# Altium PCB HW_Z-BAND_SMART_AMP_R1.PcbDoc (part 3 of 5)
Units mil, origin at the board's own origin, x right, y up, seen from the top; angles counter-clockwise.
Board outline 10200 x 3900 mil, 4 copper layers (Top Layer, Int1 (GND), Int2 (PWR), Bottom Layer), stack 60.134 mil thick; 398 components, 240 nets, 1098 pads, 2492 vias.
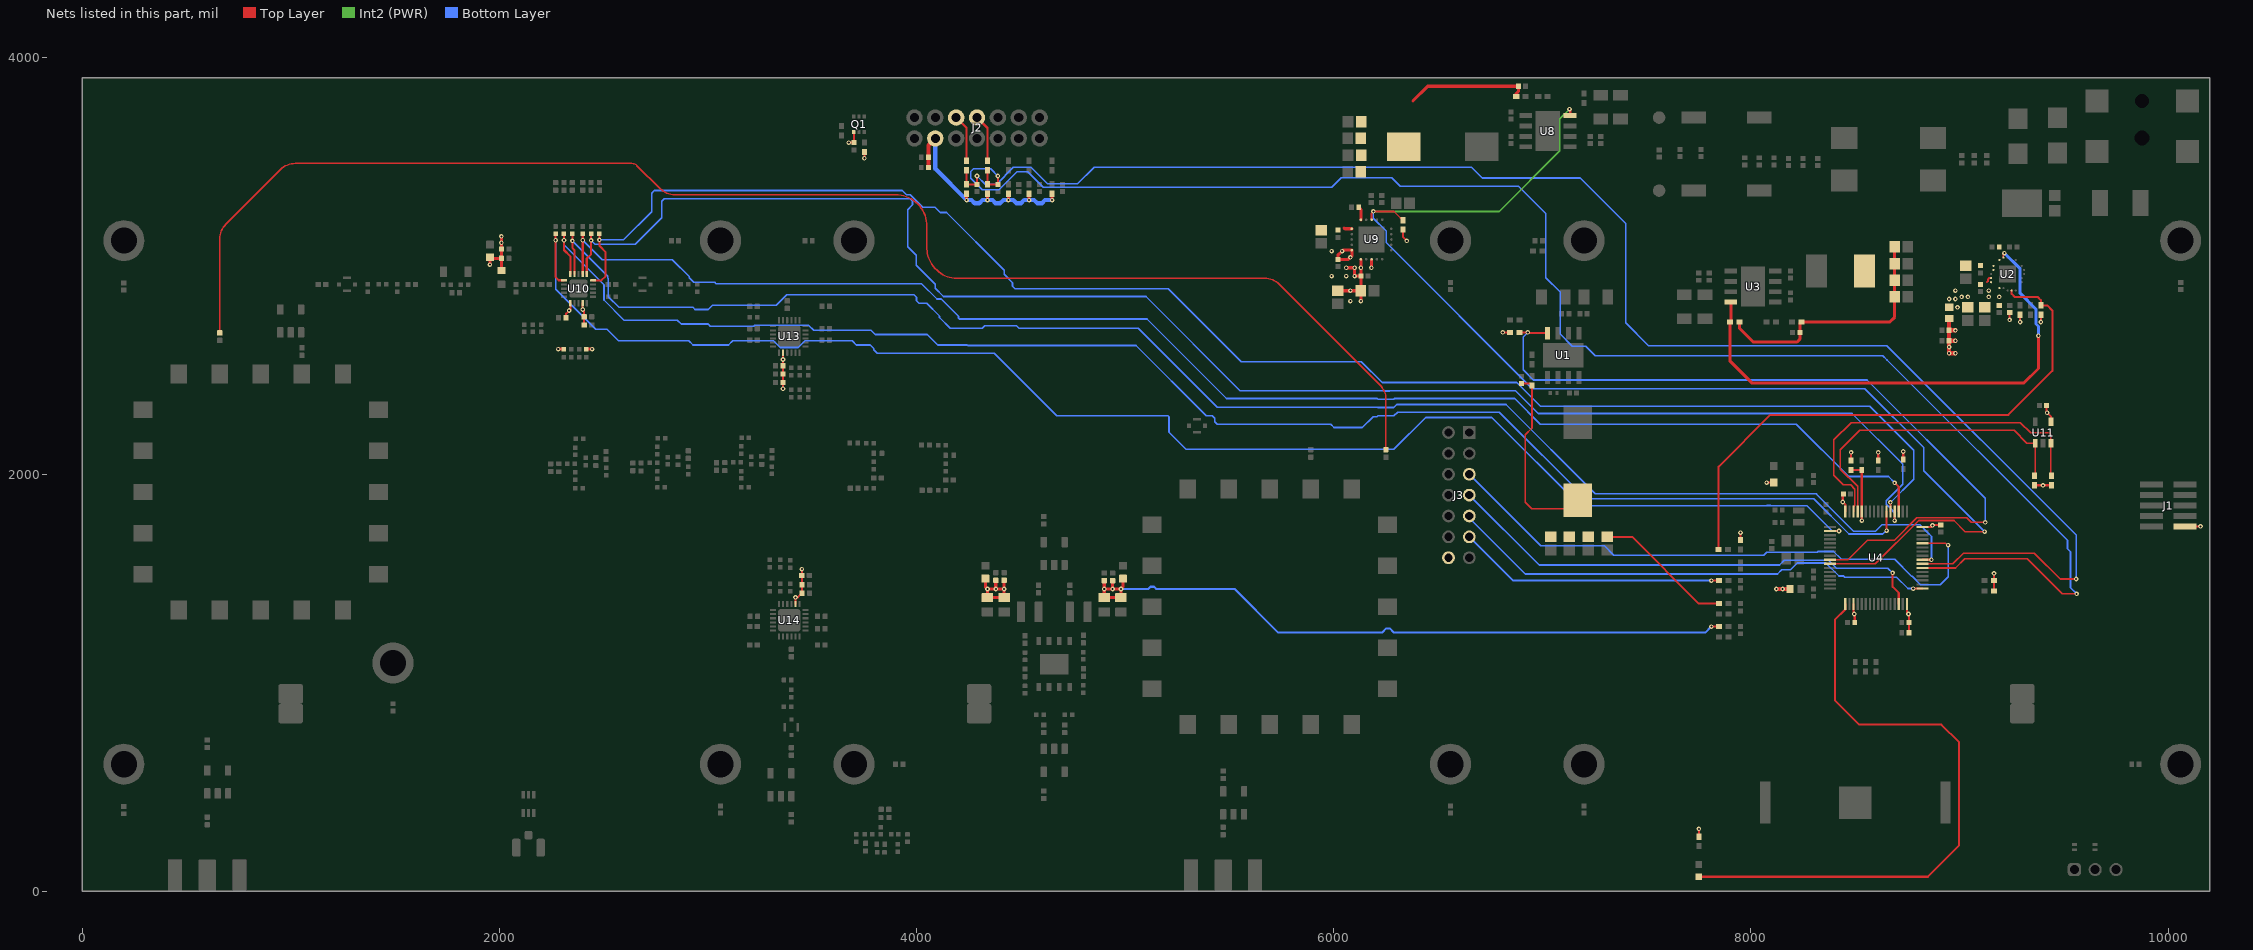
[diagram p4: the nets of this part, all layers, seen from the top]

## Part data (continued)
R3 R9 R10 R15 R16 R18 R19 R22 R23 R24 R25 R26 R27 R29 R31 R33 R39 R40 R41 R42 R43 R48 R129: library part RC0402FR-0710KL, "RES 10K OHM 1% 1/16W 0402", Device Package="0402 (1005 Metric)", Manufacturer=Yageo, Operating Temperature="-55°C ~ 155°C", Power (Watts)="0.063W, 1/16W", Supplier Device Package=0402, Supplier Part Number 1=311-10.0KLRCT-ND, Temperature Coefficient=±100ppm/°C, Tolerance=±1%, ComponentLink1Description=Datasheet, ComponentLink1URL=https://www.yageo.com/upload/media/product/productsearch/datasheet/rchip/PYu-RC_Group_51_RoHS_L_10.pdf, ComponentLink2Description="DigiKey Link", ComponentLink2URL=https://www.digikey.com/en/products/detail/yageo/RC0402FR-0710KL/726523, Composition="Thick Film", Features="Moisture Resistant", Height - Seated (Max)="0.016\" (0.40mm)", Lifecycle Status=Active, Minimum Order=1, Number of Terminations=2, Package / Case="0402 (1005 Metric)", Packaging=CutTape, Part Number=RC0402FR-0710KL, Part Status=Active, PartId=17593, Price=0.01, Resistance="10 kOhms", Series=RC_L, Size / Dimension="0.039\" L x 0.020\" W (1.00mm x 0.50mm)", Supplier 1=DigiKey
  R3 R9 R10 R15 R16 R18 R19 R23 R24 R25 R26 R27 R39 R40 R41 R42 R43 R48: LastUpdated="4/6/2026 7:41:07 PM"
  R22 R29 R31 R33 R129: LastUpdated="30.04.2023 19:24:29"
R4: library part RC0402FR-0724K9L, "RES 24.9K OHM 1% 1/16W 0402", Device Package="0402 (1005 Metric)", Manufacturer=Yageo, Operating Temperature="-55°C ~ 155°C", Power (Watts)="0.063W, 1/16W", Supplier Device Package=0402, Supplier Part Number 1=311-24.9KLRCT-ND, Temperature Coefficient=±100ppm/°C, Tolerance=±1%, ComponentLink1Description=Datasheet, ComponentLink1URL=https://www.yageo.com/upload/media/product/productsearch/datasheet/rchip/PYu-RC_Group_51_RoHS_L_10.pdf, ComponentLink2Description="DigiKey Link", ComponentLink2URL=https://www.digikey.com/en/products/detail/yageo/RC0402FR-0724K9L/726567, Composition="Thick Film", Features="Moisture Resistant", Height - Seated (Max)="0.016\" (0.40mm)", LastUpdated="4/6/2026 7:41:07 PM", Lifecycle Status=Active, Minimum Order=1, Number of Terminations=2, Package / Case="0402 (1005 Metric)", Packaging=CutTape, Part Number=RC0402FR-0724K9L, Part Status=Active, PartId=17908, Price=0.01, Resistance="24.9 kOhms", Series=RC_L, Size / Dimension="0.039\" L x 0.020\" W (1.00mm x 0.50mm)", Supplier 1=DigiKey
R5: "RES 100R 1/10W 0402 1%", Manufacturer 1="PANASONIC ELECTRONIC COMPONENTS", Manufacturer Part Number 1=ERJ-2RKF1000X, Package=0402, PackageType=SMD, Tolerance=±1%, Check=Approved, ComponentLink1Description=Digi-Key, ComponentLink1URL=https://www.digikey.com/en/products/detail/panasonic-electronic-components/ERJ-2RKF1000X/192080?utm_adgroup=&utm_source=google&utm_medium=cpc&utm_campaign=Pmax_Product_All%20Products&utm_term=&utm_content=&utm_id=go_cmp-18790247214_adg-_ad-__dev-c_ext-_prd-_sig-EAIaIQobChMIqPWSmvPUggMVK5JoCR2T3g0zEAAYASAAEgI7GvD_BwE&gad_source=1&gclid=EAIaIQobChMIqPWSmvPUggMVK5JoCR2T3g0zEAAYASAAEgI7GvD_BwE, ComponentLink2Description=Datasheet, Location=NA, MaxHeight_mm=0.4, MSL Level=Level-1, Status=Active, UnitPrice=0.1
R6: "RES 820R 1/10W 0402 1%", M_Frequency(MHz)=NA, M_RatedPower(W)=0.1, Manufacturer 1="KOA SPEER ELECTRONICS, INC.", Manufacturer Part Number 1=RK73H1ETTP8200F, Package=0402, PackageType=SMD, Supplier Part Number 1=2019-RK73H1ETTP8200FTR-ND, Tolerance=±1%, Check=Approved, Location=NA, M_AmpersPerContact=NA, M_Duty Cycle(%)=NA, M_ESR(mΩ)=NA, M_MatingCycle=NA, M_Number_of_Bits(K)=NA, M_Number_of_Pins=2, M_Number_of_Transistors_Gates_or_Bits=NA, M_OperatingVoltage(V)=NA, M_ProgrammingCycles=NA, M_RatedVoltage(V)=NA, M_ThermalResistance(θJABC)(°C/W)=NA, MaxHeight_mm=0.4, MSL Level=Level-1, Status=Active, Supplier 1=Digikey, UnitPrice=0.1
R7 R35 R37 R130: library part AC0402FR-07100KL, "RES SMD 100K OHM 1% 1/16W 0402", Device Package="0402 (1005 Metric)", Manufacturer=Yageo, Operating Temperature="-55°C ~ 155°C", Power (Watts)="0.063W, 1/16W", Ratings=AEC-Q200, Supplier Device Package=0402, Supplier Part Number 1=YAG3434CT-ND, Temperature Coefficient=±100ppm/°C, Tolerance=±1%, ComponentLink1Description=Datasheet, ComponentLink1URL=https://www.yageo.com/upload/media/product/productsearch/datasheet/rchip/PYu-AC_51_RoHS_L_7.pdf, ComponentLink2Description="DigiKey Link", ComponentLink2URL=https://www.digikey.com/en/products/detail/yageo/AC0402FR-07100KL/5895021, Composition="Thick Film", Features="Automotive AEC-Q200, Moisture Resistant", Height - Seated (Max)="0.015\" (0.37mm)", LastUpdated="4/6/2026 7:41:12 PM", Lifecycle Status=Active, Minimum Order=1, Number of Terminations=2, Package / Case="0402 (1005 Metric)", Packaging=CutTape, Part Number=AC0402FR-07100KL, Part Status=Active, PartId=12047, Price=0.01, Resistance="100 kOhms", Series=AC, Size / Dimension="0.039\" L x 0.020\" W (1.00mm x 0.50mm)", Supplier 1=DigiKey
R17: library part ERA-2AEB3572X, "RES SMD 35.7KOHM 0.1% 1/16W 0402", Device Package="0402 (1005 Metric)", Manufacturer="Panasonic Electronic Components", Operating Temperature="-55°C ~ 155°C", Power (Watts)="0.063W, 1/16W", Ratings=AEC-Q200, Supplier Device Package=0402, Supplier Part Number 1=P35.7KDCCT-ND, Temperature Coefficient=±25ppm/°C, Tolerance=±0.1%, ComponentLink1Description=Datasheet, ComponentLink1URL=https://industrial.panasonic.com/cdbs/www-data/pdf/RDM0000/AOA0000C307.pdf, ComponentLink2Description="DigiKey Link", ComponentLink2URL=https://www.digikey.com/en/products/detail/panasonic-electronic-components/ERA-2AEB3572X/2026192, Composition="Thin Film", Features="Automotive AEC-Q200", Height - Seated (Max)="0.016\" (0.40mm)", LastUpdated="2/9/2024 8:29:52 PM", Lifecycle Status=Active, Minimum Order=1, Number of Terminations=2, Package / Case="0402 (1005 Metric)", Packaging=TapeAndReel, Part Number=ERA-2AEB3572X, Part Status=Active, PartId=11364, Price=0.04, Resistance="35.7 kOhms", Series=ERA-2A, Size / Dimension="0.039\" L x 0.020\" W (1.00mm x 0.50mm)", Supplier 1=DigiKey
R20 R21 R30 R45 R46 R47: library part RT0402FRE07100RL, "RES SMD 100 OHM 1% 1/16W 0402", Device Package="0402 (1005 Metric)", Manufacturer=Yageo, Operating Temperature="-55°C ~ 155°C", Power (Watts)="0.063W, 1/16W", Supplier Device Package=0402, Supplier Part Number 1=YAG3342CT-ND, Temperature Coefficient=±50ppm/°C, Tolerance=±1%, ComponentLink1Description=Datasheet, ComponentLink1URL=https://www.yageo.com/upload/media/product/productsearch/datasheet/rchip/PYu-RT_1-to-0.01_RoHS_L_11.pdf, ComponentLink2Description="DigiKey Link", ComponentLink2URL=https://www.digikey.com/en/products/detail/yageo/RT0402FRE07100RL/1071699, Composition="Thin Film", Height - Seated (Max)="0.014\" (0.35mm)", LastUpdated="4/6/2026 7:41:17 PM", Lifecycle Status=Active, Minimum Order=1, Number of Terminations=2, Package / Case="0402 (1005 Metric)", Packaging=TapeAndReel, Part Number=RT0402FRE07100RL, Part Status=Active, PartId=3193, Price=0.01, Resistance="100 Ohms", Series=RT, Size / Dimension="0.039\" L x 0.020\" W (1.00mm x 0.50mm)", Supplier 1=DigiKey
R28: library part RT0402FRE0712K4L, "RES SMD 12.4K OHM 1% 1/16W 0402", Device Package="0402 (1005 Metric)", Manufacturer=Yageo, Operating Temperature="-55°C ~ 155°C", Power (Watts)="0.063W, 1/16W", Supplier Device Package=0402, Supplier Part Number 1=13-RT0402FRE0712K4LCT-ND, Temperature Coefficient=±50ppm/°C, Tolerance=±1%, ComponentLink1Description=Datasheet, ComponentLink1URL=https://www.yageo.com/upload/media/product/productsearch/datasheet/rchip/PYu-RT_1-to-0.01_RoHS_L_12.pdf, ComponentLink2Description="DigiKey Link", ComponentLink2URL=https://www.digikey.com/en/products/detail/yageo/RT0402FRE0712K4L/1071739, Composition="Thin Film", Height - Seated (Max)="0.014\" (0.35mm)", LastUpdated="4/6/2026 7:40:57 PM", Lifecycle Status=Active, Minimum Order=1, Number of Terminations=2, Package / Case="0402 (1005 Metric)", Packaging=TapeAndReel, Part Number=RT0402FRE0712K4L, Part Status=Active, PartId=64983, Price=0.01, Resistance="12.4 kOhms", Series=RT, Size / Dimension="0.039\" L x 0.020\" W (1.00mm x 0.50mm)", Supplier 1=DigiKey
R32 R44: library part RMCF0402FT2K20, "RES 2.2K OHM 1% 1/16W 0402", Device Package="0402 (1005 Metric)", Manufacturer="Stackpole Electronics Inc", Operating Temperature="-55°C ~ 155°C", Power (Watts)="0.063W, 1/16W", Ratings=AEC-Q200, Supplier Device Package=0402, Supplier Part Number 1=RMCF0402FT2K20CT-ND, Temperature Coefficient=±100ppm/°C, Tolerance=±1%, ComponentLink1Description=Datasheet, ComponentLink1URL=https://www.seielect.com/catalog/sei-rmcf_rmcp.pdf, ComponentLink2Description="DigiKey Link", ComponentLink2URL=https://www.digikey.com/en/products/detail/stackpole-electronics-inc/RMCF0402FT2K20/2417439, Composition="Thick Film", Features="Automotive AEC-Q200", Height - Seated (Max)="0.016\" (0.40mm)", LastUpdated="2/9/2024 8:30:13 PM", Lifecycle Status=Active, Minimum Order=1, Number of Terminations=2, Package / Case="0402 (1005 Metric)", Packaging=CutTape, Part Number=RMCF0402FT2K20, Part Status=Active, PartId=4919, Price=0.01, Resistance="2.2 kOhms", Series=RMCF, Size / Dimension="0.039\" L x 0.020\" W (1.00mm x 0.50mm)", Supplier 1=DigiKey
R34: library part AC0402FR-0712K4L, "RES SMD 12.4K OHM 1% 1/16W 0402", Device Package="0402 (1005 Metric)", Manufacturer=Yageo, Operating Temperature="-55°C ~ 155°C", Power (Watts)="0.063W, 1/16W", Ratings=AEC-Q200, Supplier Device Package=0402, Supplier Part Number 1=YAG5256CT-ND, Temperature Coefficient=±100ppm/°C, Tolerance=±1%, ComponentLink1Description=Datasheet, ComponentLink1URL=https://www.yageo.com/upload/media/product/productsearch/datasheet/rchip/PYu-AC_51_RoHS_L_7.pdf, ComponentLink2Description="DigiKey Link", ComponentLink2URL=https://www.digikey.com/en/products/detail/yageo/AC0402FR-0712K4L/5895055, Composition="Thick Film", Features="Automotive AEC-Q200, Moisture Resistant", Height - Seated (Max)="0.015\" (0.37mm)", LastUpdated="4/6/2026 7:41:12 PM", Lifecycle Status=Active, Minimum Order=1, Number of Terminations=2, Package / Case="0402 (1005 Metric)", Packaging=CutTape, Part Number=AC0402FR-0712K4L, Part Status=Active, PartId=11140, Price=0.01, Resistance="12.4 kOhms", Series=AC, Size / Dimension="0.039\" L x 0.020\" W (1.00mm x 0.50mm)", Supplier 1=DigiKey
R36: library part ERA-2AEB4121X, "RES SMD 4.12KOHM 0.1% 1/16W 0402", Device Package="0402 (1005 Metric)", Manufacturer="Panasonic Electronic Components", Operating Temperature="-55°C ~ 155°C", Power (Watts)="0.063W, 1/16W", Ratings=AEC-Q200, Supplier Device Package=0402, Supplier Part Number 1=P4.12KDCCT-ND, Temperature Coefficient=±25ppm/°C, Tolerance=±0.1%, ComponentLink1Description=Datasheet, ComponentLink1URL=https://industrial.panasonic.com/cdbs/www-data/pdf/RDM0000/AOA0000C307.pdf, ComponentLink2Description="DigiKey Link", ComponentLink2URL=https://www.digikey.com/en/products/detail/panasonic-electronic-components/ERA-2AEB4121X/2026108, Composition="Thin Film", Features="Automotive AEC-Q200", Height - Seated (Max)="0.016\" (0.40mm)", LastUpdated="2/9/2024 8:30:08 PM", Lifecycle Status=Active, Minimum Order=1, Number of Terminations=2, Package / Case="0402 (1005 Metric)", Packaging=TapeAndReel, Part Number=ERA-2AEB4121X, Part Status=Active, PartId=6142, Price=0.04, Resistance="4.12 kOhms", Series=ERA-2A, Size / Dimension="0.039\" L x 0.020\" W (1.00mm x 0.50mm)", Supplier 1=DigiKey
R49 R80 R81: "RES 5R6 1/10W 0402 1%", M_Frequency(MHz)=NA, M_RatedPower(W)=0.1, Manufacturer 1="KOA SPEER ELECTRONICS, INC.", Manufacturer Part Number 1=RK73H1ETTP5R60F, Package=0402, PackageType=SMD, Supplier Part Number 1=2019-RK73H1ETTP5R60FTR-ND, Tolerance=±1%, Check=Approved, Location=NA, M_AmpersPerContact=NA, M_Duty Cycle(%)=NA, M_ESR(mΩ)=NA, M_MatingCycle=NA, M_Number_of_Bits(K)=NA, M_Number_of_Pins=2, M_Number_of_Transistors_Gates_or_Bits=NA, M_OperatingVoltage(V)=NA, M_ProgrammingCycles=NA, M_RatedVoltage(V)=NA, M_ThermalResistance(θJABC)(°C/W)=NA, MaxHeight_mm=0.4, MSL Level=Level-1, Status=Active, Supplier 1=Digikey, UnitPrice=0.1
R50 R51 R82 R83 R84 R85: "RES 866R 1/10W 0402 1%", M_Frequency(MHz)=NA, M_RatedPower(W)=0.1, Manufacturer 1="KOA SPEER ELECTRONICS, INC.", Manufacturer Part Number 1=RK73H1ETTP8660F, Package=0402, PackageType=SMD, Supplier Part Number 1=2019-RK73H1ETTP8660FTR-ND, Tolerance=±1%, Check=Approved, Location=NA, M_AmpersPerContact=NA, M_Duty Cycle(%)=NA, M_ESR(mΩ)=NA, M_MatingCycle=NA, M_Number_of_Bits(K)=NA, M_Number_of_Pins=2, M_Number_of_Transistors_Gates_or_Bits=NA, M_OperatingVoltage(V)=NA, M_ProgrammingCycles=NA, M_RatedVoltage(V)=NA, M_ThermalResistance(θJABC)(°C/W)=NA, MaxHeight_mm=0.4, MSL Level=Level-1, Status=Active, Supplier 1=Digikey, UnitPrice=0.1
R52 R53 R54 R58 R59 R72 R74 R75 R76 R77 R78 R79 R125 R126 R127 R128: "RES 0R 1/10W 0402", M_Frequency(MHz)=NA, M_RatedPower(W)=0.1, Manufacturer 1="PANASONIC ELECTRONIC COMPONENTS", Manufacturer Part Number 1=ERJ-2GE0R00X, Package=0402, PackageType=SMD, Supplier Part Number 1=P0.0JTR-ND, Check=Approved, ComponentLink1Description=Digi-Key, ComponentLink1URL=https://www.digikey.com/en/products/detail/panasonic-electronic-components/ERJ-2GE0R00X/146727?utm_adgroup=&utm_source=google&utm_medium=cpc&utm_campaign=Pmax_Product_All%20Products&utm_term=&utm_content=&utm_id=go_cmp-18790247214_adg-_ad-__dev-c_ext-_prd-_sig-EAIaIQobChMI6dXOvs-qgwMVM4loCR0TKwG5EAAYASAAEgIbCfD_BwE&gad_source=1&gclid=EAIaIQobChMI6dXOvs-qgwMVM4loCR0TKwG5EAAYASAAEgIbCfD_BwE, ComponentLink2Description=Datasheet, ComponentLink2URL="D:\SAVRONIK_SVN\Donanım\trunk\ALTIUM\Central Library\Datasheets\Resistor\ERJ-2GE0R00X_Datasheet.pdf", Location=NA, M_AmpersPerContact=NA, M_Duty Cycle(%)=NA, M_ESR(mΩ)=NA, M_MatingCycle=NA, M_Number_of_Bits(K)=NA, M_Number_of_Pins=2, M_Number_of_Transistors_Gates_or_Bits=NA, M_OperatingVoltage(V)=NA, M_ProgrammingCycles=NA, M_RatedVoltage(V)=NA, M_ThermalResistance(θJABC)(°C/W)=NA, MaxHeight_mm=0.4, MSL Level=Level-1, SAP=1014381, Status=Active, Supplier 1=Digikey, UnitPrice=0.1
R55 R67 R68 R73 R96 R97 R99 R100 R101 R103 R106 R110 R111 R112 R115 R121 R122 R131 R132 R133: "RES 0R 1/10W 0402", Manufacturer 1="PANASONIC ELECTRONIC COMPONENTS", Manufacturer Part Number 1=ERJ-2GE0R00X, Package=0402, PackageType=SMD, Supplier Part Number 1=P0.0JTR-ND, Check=Approved, ComponentLink1Description=Digi-Key, ComponentLink1URL=https://www.digikey.com/en/products/detail/panasonic-electronic-components/ERJ-2GE0R00X/146727?utm_adgroup=&utm_source=google&utm_medium=cpc&utm_campaign=Pmax_Product_All%20Products&utm_term=&utm_content=&utm_id=go_cmp-18790247214_adg-_ad-__dev-c_ext-_prd-_sig-EAIaIQobChMI6dXOvs-qgwMVM4loCR0TKwG5EAAYASAAEgIbCfD_BwE&gad_source=1&gclid=EAIaIQobChMI6dXOvs-qgwMVM4loCR0TKwG5EAAYASAAEgIbCfD_BwE, ComponentLink2Description=Datasheet, Location=NA, MaxHeight_mm=0.4, MSL Level=Level-1, Status=Active, Supplier 1=Digikey, UnitPrice=0.1
  R55 R97 R103: Assembly=DNP
R56 R60 R61 R62 R63: "RES 10K 1/10W 0402 1%", Manufacturer 1="PANASONIC ELECTRONIC COMPONENTS", Manufacturer Part Number 1=ERJ-2RKF1002X, Package=0402, PackageType=SMD, Supplier Part Number 1=P10.0KLTR-ND, Tolerance=±1%, Check=Approved, ComponentLink1Description=Digi-Key, ComponentLink1URL=https://www.digikey.com/en/products/detail/panasonic-electronic-components/ERJ-2RKF1002X/192073, ComponentLink2Description=Datasheet, Location=NA, MaxHeight_mm=0.4, MSL Level=Level-1, Status=Active, Supplier 1=Digikey, UnitPrice=0.1
R57 R98 R104 R107: "RES 10R 1/10W 0402 1%", Manufacturer 1="PANASONIC ELECTRONIC COMPONENTS", Manufacturer Part Number 1=ERJ-2RKF10R0X, Package=0402, PackageType=SMD, Supplier Part Number 1=P10.0LTR-ND, Tolerance=±1%, Check=Approved, ComponentLink1Description=Digi-Key, ComponentLink1URL=https://www.digikey.com/en/products/detail/panasonic-electronic-components/erj-2rkf10r0x/192072, ComponentLink2Description=Datasheet, Location=NA, MaxHeight_mm=0.4, MSL Level=Level-1, Status=Active, Supplier 1=Digikey, UnitPrice=0.1
  R57 R98 R104: Assembly=DNP
R64 R65 R66 R69 R70 R71: "RES 10K 1/10W 0402 1%", M_Frequency(MHz)=NA, Manufacturer 1="PANASONIC ELECTRONIC COMPONENTS", Manufacturer Part Number 1=ERJ-2RKF1002X, Package=0402, PackageType=SMD, Supplier Part Number 1=P10.0KLTR-ND, Tolerance=±1%, Check=Approved, ComponentLink1Description=Digi-Key, ComponentLink1URL=https://www.digikey.com/en/products/detail/panasonic-electronic-components/ERJ-2RKF1002X/192073, ComponentLink2Description=Datasheet, Location=NA, M_AmpersPerContact=NA, M_Duty Cycle(%)=NA, M_MatingCycle=NA, M_Number_of_Bits(K)=NA, M_Number_of_Transistors_Gates_or_Bits=NA, M_OperatingVoltage(V)=NA, M_ProgrammingCycles=NA, MaxHeight_mm=0.4, MSL Level=Level-1, Status=Active, Supplier 1=Digikey, UnitPrice=0.1
R86 R94: "RES 270R 1/10W 0402 1%", M_Frequency(MHz)=NA, M_RatedPower(W)=0.1, Manufacturer 1="KOA SPEER ELECTRONICS, INC.", Manufacturer Part Number 1=RK73H1ETTP2700F, Package=0402, PackageType=SMD, Tolerance=±1%, Check=Approved, Location=NA, M_AmpersPerContact=NA, M_Duty Cycle(%)=NA, M_ESR(mΩ)=NA, M_MatingCycle=NA, M_Number_of_Bits(K)=NA, M_Number_of_Pins=2, M_Number_of_Transistors_Gates_or_Bits=NA, M_OperatingVoltage(V)=NA, M_ProgrammingCycles=NA, M_RatedVoltage(V)=NA, M_ThermalResistance(θJABC)(°C/W)=NA, MaxHeight_mm=0.4, MSL Level=Level-1, Status=Active, Supplier 1=Digikey, UnitPrice=0.1
R87 R95: "RES 200R 1/10W 0402 1%", M_Frequency(MHz)=NA, M_RatedPower(W)=0.1, Manufacturer 1="KOA SPEER ELECTRONICS, INC.", Manufacturer Part Number 1=RK73H1ETTP2000F, Package=0402, PackageType=SMD, Supplier Part Number 1=2019-RK73H1ETTP2000FTR-ND, Tolerance=±1%, Check=Approved, ComponentLink1Description=Digi-Key, ComponentLink1URL=https://www.digikey.com/en/products/detail/koa-speer-electronics-inc/RK73H1ETTP2000F/9844174, ComponentLink2Description=Datasheet, ComponentLink2URL=D:\IFF\IFF_Library\Datasheets\Resistor\RK73H1ETTP2800F_Datasheet.pdf, Location=NA, M_AmpersPerContact=NA, M_Duty Cycle(%)=NA, M_ESR(mΩ)=NA, M_MatingCycle=NA, M_Number_of_Bits(K)=NA, M_Number_of_Pins=2, M_Number_of_Transistors_Gates_or_Bits=NA, M_OperatingVoltage(V)=NA, M_ProgrammingCycles=NA, M_RatedVoltage(V)=NA, M_ThermalResistance(θJABC)(°C/W)=NA, MaxHeight_mm=0.4, MSL Level=Level-1, Status=Active, Supplier 1=Digikey, UnitPrice=0.1
R88 R89 R92 R93: "RES 10R 1/2W 0805 1%", M_Frequency(MHz)=NA, M_OperatingTemperatureRange(-°C/+°C)=-55/155, M_RatedPower(W)=0.25, Manufacturer 1="VISHAY DALE", Manufacturer Part Number 1=CRCW080510R0FKEAHP, Package=0805, PackageType=SMD, Supplier Part Number 1=541-10.0TTR-ND, Tolerance=±1%, Check=Approved, ComponentLink1Description=Digi-Key, ComponentLink1URL=https://www.digikey.com/en/products/detail/vishay-dale/CRCW080510R0FKEAHP/2222320, ComponentLink2Description=Datasheet, ComponentLink2URL=D:\IFF\IFF_Library\Datasheets\Resistor\CRCW080510R0FKEAHP_Datasheet.pdf, Location=NA, M_AmpersPerContact=NA, M_Duty Cycle(%)=NA, M_ESR(mΩ)=NA, M_MatingCycle=NA, M_Number_of_Bits(K)=NA, M_Number_of_Pins=2, M_Number_of_Transistors_Gates_or_Bits=NA, M_OperatingPower(W)=NA, M_OperatingVoltage(V)=NA, M_ProgrammingCycles=NA, M_RatedVoltage(V)=NA, M_ThermalResistance(θJABC)(°C/W)=NA, MaxHeight_mm=0.58, MSL Level=Level-1, Status=Active, Supplier 1=Digi-Key, UnitPrice=0.18
R90 R91: "RES 1K 1/10W 0402 1%", Manufacturer 1="PANASONIC ELECTRONIC COMPONENTS", Manufacturer Part Number 1=ERJ-2RKF1001X, Package=0402, PackageType=SMD, Supplier Part Number 1=P1.00KLTR-ND, Tolerance=±1%, Check=Approved, ComponentLink1Description=Digi-Key, ComponentLink1URL=https://www.digikey.com/en/products/detail/panasonic-electronic-components/ERJ-2RKF1001X/79729?s=N4IgTCBcDaIEoCkC0Y4GkBiBGADDrAGiALoC%2BQA, ComponentLink2Description=Datasheet, Location=NA, MaxHeight_mm=0.4, MSL Level=Level-1, Status=Active, Supplier 1=Digikey, UnitPrice=0.1
R102 R105 R108 R109 R113 R114 R117 R118 R123 R124: "RES 51R 1/10W 0402 1%", M_Frequency(MHz)=NA, M_RatedPower(W)=0.1, Manufacturer 1="KOA SPEER ELECTRONICS, INC.", Manufacturer Part Number 1=RK73H1ETTP51R0F, Package=0402, PackageType=SMD, Supplier Part Number 1=2019-RK73H1ETTP51R0FTR-ND, Tolerance=±1%, Check=Approved, Location=NA, M_AmpersPerContact=NA, M_Duty Cycle(%)=NA, M_ESR(mΩ)=NA, M_MatingCycle=NA, M_Number_of_Bits(K)=NA, M_Number_of_Pins=2, M_Number_of_Transistors_Gates_or_Bits=NA, M_OperatingVoltage(V)=NA, M_ProgrammingCycles=NA, M_RatedVoltage(V)=NA, M_ThermalResistance(θJABC)(°C/W)=NA, MaxHeight_mm=0.4, MSL Level=Level-1, Status=Active, Supplier 1=Digikey, UnitPrice=0.1
  R102 R105 R113 R117 R118 R123 R124: Assembly=DNP
R116 R119 R120: library part AC0402JR-070RL, "RES SMD 0 OHM JUMPER 1/16W 0402", Device Package="0402 (1005 Metric)", Manufacturer=Yageo, Operating Temperature="-55°C ~ 155°C", Power (Watts)="0.063W, 1/16W", Ratings=AEC-Q200, Supplier Device Package=0402, Supplier Part Number 1=311-0.0LBCT-ND, Tolerance=Jumper, ComponentLink1Description=Datasheet, ComponentLink1URL=https://www.yageo.com/upload/media/product/productsearch/datasheet/rchip/PYu-AC_51_RoHS_L_7.pdf, ComponentLink2Description="DigiKey Link", ComponentLink2URL=https://www.digikey.com/en/products/detail/yageo/AC0402JR-070RL/2827807, Composition="Thick Film", Features="Automotive AEC-Q200, Moisture Resistant", Height - Seated (Max)="0.015\" (0.37mm)", LastUpdated="4/6/2026 7:41:03 PM", Lifecycle Status=Active, Minimum Order=1, Number of Terminations=2, Package / Case="0402 (1005 Metric)", Packaging=CutTape, Part Number=AC0402JR-070RL, Part Status=Active, PartId=20617, Price=0.01, Resistance="0 Ohms", Series=AC, Size / Dimension="0.039\" L x 0.020\" W (1.00mm x 0.50mm)", Supplier 1=DigiKey
T1 T4: library part TP, DESIG="testing PAD", FAB=NA, PCB Footprint=test0_8-smd, REF=NA, VAL="NOT POPULATED"
TP1 TP2 TP3: "MECH PC TEST POINT COMPACT", Manufacturer 1=KEYSTONE, PackageType=SMD, Supplier Part Number 1=36-5018TR-ND, Check=Approved, ComponentLink1Description=Digikey, ComponentLink1URL=https://www.digikey.com/en/products/detail/keystone-electronics/5018/1979204, ComponentLink2Description=Datasheet, ComponentLink2URL="D:\SAVRONIK_SVN\Donanım\trunk\ALTIUM\Central Library\Datasheets\Mechanical\5018_Datasheet.pdf", Location=NA, M_Number_of_Pins=1, Manufacturer Part Number 1=5018, MaxHeight_mm=2.29, MSL Level=Level-1, Package=5018, SAP=1029058, Status=Active, Supplier 1=Digikey, UnitPrice=0.38
U1 U3 U8: library part CMP-04918-000184-1, "IC REG BUCK ADJUSTABLE 3A 8SOPWR", Max Input Voltage=36V, Max Operating Temperature=125°C, Max Output Voltage=24V, Min Input Voltage=3.8V, Min Operating Temperature=-40°C, Min Output Voltage=1V, Output Current=3A, Switching Frequency=400kHz, Mount="Surface Mount", Number of Outputs=1, Number of Pins=8, Output Configuration=Positive, Output Type=Adjustable, Packaging="Cut Tape", RoHS Compliant=Yes, Synchronous Rectifier=Yes
U2: library part CMP-2000-07286-2, "IC REG LINEAR POS ADJ 2A 20VQFN", Case/Package=VQFN, Dropout Voltage=125mV, Max Input Voltage=6.5V, Max Operating Temperature=125°C, Max Output Current=2A, Max Output Voltage=5V, Min Current Limit=2.1A, Min Input Voltage=1.1V, Min Operating Temperature=-40°C, Min Output Voltage=800mV, Package Quantity=250, Power Supply Rejection Ratio (PSRR)=40dB, Quiescent Current=2.8mA, Accuracy=1%, Contact Plating=Gold, Lead Free="Lead Free", Mount="Surface Mount", Number of Outputs=1, Number of Pins=20, Number of Regulators=1, Output Current=2A, Output Type=Adjustable, Output Voltage=5V, Packaging="Tape and Reel", Polarity=Positive, Radiation Hardening=No, REACH SVHC="No SVHC", Reference Voltage=800mV, RoHS Compliant=Yes, Weight=0.002469oz
U4: "Ultra-low-power with FPU Arm Cortex-M4 MCU 80 MHz with 128 Kbytes of Flash memory", Manufacturer_Name=STMicroelectronics, Copyright="Copyright (C) 2026 Ultra Librarian. All rights reserved.", Manufacturer Part Number=STM32L431RBT6, Manufacturer_Part_Number=STM32L431RBT6, RefDes=RefDes, Supplier 1=Farnell, Supplier Part Number 1=STM32L431RBT6, Type=Type
U5 U19: "RF Dir. Coupler 5-1000 MHz SMD 75 OHM -40°C~85°C", M_Frequency(MHz)=NA, Manufacturer 1="Mini Circuit", Package=AT790-1, PackageType=SMD, Check=Approved, Location=NA, M_AmpersPerContact=NA, M_Duty Cycle(%)=NA, M_ESR(mΩ)=NA, M_MatingCycle=NA, M_OperatingVoltage(V)=NA, M_RatedVoltage(V)=NA, Manufacturer Part Number 1=DBTC-10-4-75+, MaxHeight_mm=3.81, MSL Level=Level-1, Status=Active, UnitPrice=2.6
U6: "IC RF AMP 5-1000MHz GAIN 25dB NF 2dB OIP3 41dBm SOT-89 -40°C~85°C", M_Frequency(MHz)=NA, Manufacturer 1=RFHIC, Package=SOT-89, PackageType=SMD, Check=Approved, ComponentLink2Description=Datasheet, ComponentLink2URL=https://rfhic.com/wp-content/uploads/2024/01/AE427-25dB-5-1000-MHz-GaAs-MMIC.datasheet-download.pdf, ComponentLink3Description=RFHIC, ComponentLink3URL=https://rfhic.com/product/gaas-mmic-25db-5-1000-mhz-wireless-infrastructure-ae427/, Location=NA, M_AmpersPerContact=NA, M_Duty Cycle(%)=NA, M_ESR(mΩ)=NA, M_MatingCycle=NA, M_Number_of_Bits(K)=NA, M_Number_of_Pins=3, M_Number_of_Transistors_Gates_or_Bits=NA, M_OperatingPower(W)=NA, M_OperatingVoltage(V)=NA, M_ProgrammingCycles=NA, M_RatedPower(W)=NA, M_RatedVoltage(V)=NA, M_ThermalResistance(θJABC)(°C/W)=NA, Manufacturer Part Number 1=AE427, MaxHeight_mm=1.5, MSL Level=Level-1, Status=Active
U9: library part CMP-04917-000027-1, "IC REG LINEAR POS ADJ 1A 20VQFN", Dropout Voltage=307mV, Manufacturer="Texas Instruments", Max Junction Temp=+125°C, Max Supply Voltage=35V, Min Supply Voltage=3V, Nominal Supply Current=0.58-6.1mA, Output Current=1A, Output Voltage=1.4-20.5V, Package=RGW0020A, Temperature="-40°C to +125°C", Temperature Range Low=-40°C, Accuracy Percentage=1%, Automotive=No, Category=IC, ComponentLink2Description=Datasheet, ComponentLink2URL=http://www.ti.com/lit/ds/symlink/tps7a47.pdf, Device Class L1="Integrated Circuits (ICs)", Device Class L2="Power Management ICs", Device Class L3="Voltage Regulators - Linear", Digikey Description="IC REG LINEAR POS ADJ 1A 20VQFN", Height=1mm, Lead Free=Yes, Manufacturer Part Number=TPS7A4700RGWR, Mouser Description="LDO Voltage Regulators Low Noise,1A,Hi Vltg LDO Reg", Number of Outputs=1, Octopart=https://octopart.com/tps7a4700rgwr-texas+instruments-21221956, Output Type=AdjustableProgrammable, RoHS=TRUE, Standoff Height=0mm, Temperature Range High=+125°C
U10: "IC RF ATTENUATOR 0.5dB-31.5dB 0.001-4GHz 20-QFN -40°C~85°C", M_Frequency(MHz)=NA, Manufacturer 1=PSEMI, Package=20-QFN, PackageType=SMD, Check=Approved, Location=NA, M_AmpersPerContact=NA, M_Duty Cycle(%)=NA, M_ESR(mΩ)=NA, M_MatingCycle=NA, M_Number_of_Bits(K)=NA, M_Number_of_Pins=20, M_Number_of_Transistors_Gates_or_Bits=NA, M_OperatingPower(W)=NA, M_OperatingVoltage(V)=NA, M_ProgrammingCycles=NA, M_RatedPower(W)=NA, M_RatedVoltage(V)=NA, M_ThermalResistance(θJABC)(°C/W)=NA, Manufacturer Part Number 1=PE4312C-Z, MaxHeight_mm=1, MSL Level=Level-1, SAP=NA, Status=Active
U11: library part CMP-06313-000046-1, "IC EEPROM 2K I2C 1MHZ SOT23-5"
U12 U15: "RF Balun 0.5-2200 MHz SMD 1:1.5 -20°C~85°C", M_Frequency(MHz)=NA, Manufacturer 1="Mini Circuit", Package=AT1521, PackageType=SMD, Check=Approved, Location=NA, M_AmpersPerContact=NA, M_Duty Cycle(%)=NA, M_ESR(mΩ)=NA, M_MatingCycle=NA, M_OperatingVoltage(V)=NA, M_RatedVoltage(V)=NA, Manufacturer Part Number 1=TC1.5-1+, MaxHeight_mm=4.06, MSL Level=Level-1, Status=Active
U13 U14: "IC RF SWITCH B 0.01-8GHz 24-QFN -55°C~105°C", M_Frequency(MHz)=NA, Manufacturer 1=PSEMI, Package=24-QFN, PackageType=SMD, Check=Approved, Location=NA, M_AmpersPerContact=NA, M_Duty Cycle(%)=NA, M_ESR(mΩ)=NA, M_MatingCycle=NA, M_Number_of_Bits(K)=NA, M_Number_of_Pins=24, M_Number_of_Transistors_Gates_or_Bits=NA, M_OperatingPower(W)=NA, M_OperatingVoltage(V)=NA, M_ProgrammingCycles=NA, M_RatedPower(W)=NA, M_RatedVoltage(V)=NA, M_ThermalResistance(θJABC)(°C/W)=NA, Manufacturer Part Number 1=PE42462A-X, MaxHeight_mm=1, MSL Level=Level-1, SAP=NA, Status=Active
U16 U18: "RF Balun 0.5-2200 MHz SMD 1:1 -40°C~85°C", M_Frequency(MHz)=NA, Manufacturer 1="Mini Circuit", Package=AT1521, PackageType=SMD, Check=Approved, Location=NA, M_AmpersPerContact=NA, M_Duty Cycle(%)=NA, M_ESR(mΩ)=NA, M_MatingCycle=NA, M_OperatingVoltage(V)=NA, M_RatedVoltage(V)=NA, Manufacturer Part Number 1=TC1-1-13M+, MaxHeight_mm=4.06, MSL Level=Level-1, Status=Active
U17: "IC RF AMP 30-1000MHz GAIN 20dB NF 2.5dB OIP3 44dBm SOIC-8 -40°C~85°C", M_Frequency(MHz)=NA, Manufacturer 1=RFHIC, Package=SOIC-8, PackageType=SMD, Check=Approved, ComponentLink2Description=Datasheet, ComponentLink2URL=https://rfhic.com/wp-content/uploads/2024/05/AE618_V1.4-20dB-5-1300-MHz-GaAs-MMIC.datasheet-download.pdf, ComponentLink3Description=RFHIC, ComponentLink3URL=https://rfhic.com/product/gaas-mmic-20db-5-1300-mhz-wireless-infrastructure-ae618/, Location=NA, M_AmpersPerContact=NA, M_Duty Cycle(%)=NA, M_ESR(mΩ)=NA, M_MatingCycle=NA, M_Number_of_Bits(K)=NA, M_Number_of_Pins=8, M_Number_of_Transistors_Gates_or_Bits=NA, M_OperatingPower(W)=NA, M_OperatingVoltage(V)=NA, M_ProgrammingCycles=NA, M_RatedPower(W)=NA, M_RatedVoltage(V)=NA, M_ThermalResistance(θJABC)(°C/W)=NA, Manufacturer Part Number 1=AE618, MaxHeight_mm=1.5, MSL Level=Level-1, Status=Active
U22: "IC RF SWITCH SP2T 0.02-4GHZ SC-70 -40°C~85°C", M_Frequency(MHz)=NA, Manufacturer 1="SKYWORKS SOLUTIONS", Package=SC-70, PackageType=SMD, Supplier Part Number 1=863-1003-2-ND, Check=Approved, ComponentLink1Description=Digi-Key, ComponentLink1URL=https://www.digikey.com/en/products/detail/skyworks-solutions-inc/AS179-92LF/2052013, ComponentLink2Description=Datasheet, ComponentLink2URL=D:\IFF\IFF_Library\Datasheets\IC\AS179-92LF_Datasheet.pdf, H-Stock#=NA, Location=NA, M_AmpersPerContact=NA, M_Duty Cycle(%)=NA, M_ESR(mΩ)=NA, M_MatingCycle=NA, M_Number_of_Bits(K)=NA, M_Number_of_Pins=6, M_Number_of_Transistors_Gates_or_Bits=NA, M_ProgrammingCycles=NA, Manufacturer Part Number 1=AS179-92LF, MaxHeight_mm=1, MSL Level=Level-1, Status=Active, Supplier 1=Digi-Key, UnitPrice=0.84
Y1: library part "TSX-3225 24.0000MF20G-AC3", "CRYSTAL 24.0000MHZ 9PF SMD", ESR (Equivalent Series Resistance)="40 Ohms", Frequency Stability=±20ppm, Frequency Tolerance=±10ppm, Load Capacitance=9pF, Manufacturer=EPSON, Operating Mode=Fundamental, Operating Temperature="-40°C ~ 105°C", Package / Case="4-SMD, No Lead", Supplier Part Number 1=SER3634CT-ND, ComponentLink1Description=Datasheet, ComponentLink1URL=https://support.epson.biz/td/api/doc_check.php?dl=brief_TSX-3225&lang=en, ComponentLink2Description="DigiKey Link", ComponentLink2URL=https://www.digikey.com/en/products/detail/epson/TSX-3225-24-0000MF20G-AC3/1825443, Frequency="24 MHz", Height - Seated (Max)="0.024\" (0.60mm)", LastUpdated="6/3/2024 8:02:15 PM", Lifecycle Status=Active, Minimum Order=1, Mounting Type="Surface Mount", Packaging=TapeAndReel, Part Number="TSX-3225 24.0000MF20G-AC3", Part Status=Active, PartId=440, Price=0.40, Series=TSX-3225, Size / Dimension="0.126\" L x 0.098\" W (3.20mm x 2.50mm)", Supplier 1=DigiKey, Type="MHz Crystal"
Y2: library part ABS06-32.768KHZ-9-T, "CRYSTAL 32.7680KHZ 9PF SMD", ESR (Equivalent Series Resistance)="90 kOhms", Frequency Tolerance=±20ppm, Load Capacitance=9pF, Manufacturer="Abracon LLC", Operating Mode=Fundamental, Operating Temperature="-40°C ~ 85°C", Package / Case="2-SMD, No Lead", Supplier Part Number 1=535-10246-1-ND, ComponentLink1Description=Datasheet, ComponentLink1URL=https://abracon.com/Resonators/ABS06.pdf, ComponentLink2Description="DigiKey Link", ComponentLink2URL=https://www.digikey.com/en/products/detail/abracon-llc/ABS06-32-768KHZ-9-T/2217992, Frequency="32.768 kHz", Height - Seated (Max)="0.024\" (0.60mm)", LastUpdated="4/5/2026 8:41:05 PM", Lifecycle Status=Active, Minimum Order=1, Mounting Type="Surface Mount", Packaging=TapeAndReel, Part Number=ABS06-32.768KHZ-9-T, Part Status=Active, PartId=376, Price=0.39, Series=ABS06, Size / Dimension="0.079\" L x 0.047\" W (2.00mm x 1.20mm)", Supplier 1=DigiKey, Type="kHz Crystal (Tuning Fork)"

## Via types
v1: diameter 22, hole 10, Top Layer to Bottom Layer, tented both sides, 2396 vias
v2: diameter 19.68, hole 7.87, Top Layer to Bottom Layer, tented both sides, 30 vias
v3: diameter 19.68, hole 7.87, Top Layer to Bottom Layer, 28 vias
v4: diameter 19.68, hole 9.84, Top Layer to Bottom Layer, tented both sides, 20 vias
v5: diameter 15.75, hole 7.87, Top Layer to Bottom Layer, tented both sides, 9 vias
v6: diameter 23.62, hole 11.81, Top Layer to Bottom Layer, 9 vias

## Nets (pads, with @x,y where several pads share a name; then routed paths per layer and width w, separated by ;. In a path a pad name is that pad's centre, name@x,y a point inside that pad or via, vN(x,y) a via of type N, cw(c..) or ccw(c..) an arc to the next point about the centre after c; other vN are vias at no path point)
3V3_PG: R30.1 R35.1 U2.4 | length 2735
  Top Layer w10: R30.1@7844.72,1640 7844.72,2036.72 8093,2285 9234,2285 9445,2496 9445,2785 9420,2810 R35.1@9390,2810 9390,2835 9375,2850 9265,2850 9249.69,2865.31 U2.4@9249.69,2880.87
3V8_PG: R7.1 U2.14 U3.4 | length 2478.5
  Top Layer w6: U2.14@9210.31,3038.74 9210.31,3055.31 v1(9215,3060)
  Top Layer w15: U3.4@7903.7,2825 7903.7,2733.7 R7.1@7900,2730 7900,2541 8003,2438 9309,2438 9378,2507 v1(9378,2664)
  Bottom Layer w15: v1(9215,3060) 9290,2985 9290,2868 9366.5,2791.5 9366.5,2720.27 9378,2708.77 v1(9378,2664)
5V_PG: R130.1 U1.4 U4.9 | length 3747.1
  Top Layer w8: U4.9@8378.5,1590.16 8465.16,1590.16 8559,1684 8688,1684 8795.13,1791.13 9034.87,1791.13 9056.45,1769.55 v1(9123.09,1769.55)
  Top Layer w10: R130.1@6890,2680 v1(6930,2680) 6933.7,2676.3 U1.4@7025,2676.3
  Bottom Layer w8: v1(6930,2680) 6908,2658 6908,2501 6957,2452 8556,2452 9123.09,1884.91 v1(9123.09,1769.55)
9V_PG: R37.1 U4.10 U8.4 U9.13 | length 6006.8
  Top Layer w8: U9.13@6181.18,3220.71 6181.18,3251.18 v1(6190,3260) 6289,3260 6320.24,3228.76 6323.19,3228.76 6331,3220.95 R37.1@6331,3218 ; U4.10@8378.5,1570.47 8596.47,1570.47 8804.13,1778.13 8972.87,1778.13 9026,1725 v1(9120,1725)
  Top Layer w12: v1(7130,3750) 7132.6,3747.4 U8.4@7132.6,3720
  Int2 (PWR) w8: v1(6190,3260) 6793,3260 7084,3551 7084,3704 v1(7130,3750)
  Bottom Layer w8: v1(6190,3260) 6190,3227 6251,3166 6251,3111 6952,2410 8546,2410 8828,2128 8828,2017 v1(9120,1725) ; v1@7123.05,3747.05 7123.26,3747.05 7126.21,3750 v1(7130,3750)
+3V3: C68.2 C69.2 C70.2 C71.1 C72.2 C99.2 C101.2 C105.2 C124.2 C125.2 C126.2 C127.2 C128.2 C129.2 FB6.2 J3.11 R15.2 R34.2 R35.2 R37.2 R60.1 R62.1 R130.2 U2.1 U2.19 U2.20 U10.6 U10.9 U13.8 U14.8 | length 2119
  Top Layer w10: C101.2@2320,2750 2320,2770 v1(2335,2785) 2340.57,2790.57 U10.6@2340.57,2820.06 ; U10.9@2399.63,2820.06 2399.63,2790.37 v1(2400,2790) 2406.89,2783.11 C99.2@2406.89,2755 C105.2@2406.89,2715 ; v1(3360,2410) C126.2@3360,2440 C125.2@3360,2480.63 C124.2@3360,2520.63 v1(3360,2550) 3360.47,2550.47 U13.8@3360.47,2582.87 ; U14.8@3419.53,1377.76 3419.53,1409.53 v1(3420,1410) 3431.1,1410 C129.2@3451.26,1430.16 C128.2@3451.26,1470.16 3451.26,1513.74 C127.2@3450,1515 v1(3450,1545) ; R37.2@6331,3172.72 6331,3138 v1(6350,3119) ; v1(6810,2680) R130.2@6844.72,2680 ; v1(7810,1490) R15.2@7847.36,1490 ; 9132,2922 9136.3,2926.3 9136.3,2934.46 9142.16,2940.31 U2.19@9151.26,2940.31 ; v1(9240,2740) C68.2@9240,2775.35 ; v1(9290,2730) R34.2@9290,2764.72 ; v1(9390,2730) R35.2@9390,2764.72
  Top Layer w15: v1(2282.72,2600) R60.1@2310,2600 ; R62.1@2417.72,2600 v1(2445,2600)
  Bottom Layer w10: J3.11@6649.8,1700 6859.8,1490 v1(7810,1490)
  other v1: 8990,2800 8950,2840 8980,2840 9010,2850 9040,2850 9140,2850 9190,2850 8980,2880 9140,2880
+3V3_D: C14.2 C17.1 C18.2 C19.2 C20.2 C96.1 C97.2 C98.2 C102.2 C103.2 C104.2 D7.1 FB1.2 FB6.1 J1.1 J2.6 Q1.4 R9.2 R10.2 R16.2 R22.1 R23.2 R24.2 R25.2 R26.2 R27.2 R29.1 R32.2 R33.1 R40.2 R48.1 R129.1 U4.19 U4.32 U4.48 U4.64 U11.4 | length 2531.7
  Top Layer w10: v1(3675,3590) C98.2@3700,3590 3700,3638.82 Q1.4@3698.82,3640 ; v1(3750,3515) R48.1@3750,3544.72 ; R32.2@7750,262.64 v1(7750,300) ; R22.1@7950,1685.28 v1(7950,1720) ; v1(8075,1960) D7.1@8110,1960 ; C17.1@8442.68,1905 8440,1902.32 v1@8440,1868 ; U4.64@8452.36,1821.5 8452.36,1855.64 v1@8440,1868 ; R29.1@8480,2065.28 v1(8480,2105) ; U4.19@8491.73,1378.5 8491.73,1333.27 v1(8495,1330) 8497.32,1327.68 C18.2@8497.32,1290 ; v1(8610,2105) R40.2@8610,2065.28 R40.2@8614.72,2070 ; R16.2@8730,2070 v1(8730,2109) ; U4.32@8747.64,1378.5 8747.64,1337.36 v1(8755,1330) 8757.32,1327.68 C102.2@8757.32,1290 C19.2@8757.32,1240 ; U4.48@8821.5,1747.64 8864.73,1747.64 8870,1752.91 v1(8870,1755) 8872.32,1757.32 C20.2@8910,1757.32 ; v1(9165,1525) 9165.28,1524.72 R33.1@9165.28,1490 R129.1@9165.28,1440 ; R9.2@9360,1947.36 9399.64,1947.36 v1(9400,1947) ; v1@9400.36,1947.36 R10.2@9440,1947.36 ; C14.2@9417.32,2330 9417.32,2297.68 v1(9420,2295) 9437.4,2277.6 U11.4@9437.4,2251.18 ; J1.1@10080.12,1750 v1(10155,1750) ; v1@8440,1868 8439,1869 8439,1868 v1(8440,1867) v1@8440,1868
  Top Layer w15: v1(4240,3314.37) R27.2@4240,3344.72 ; v1(4340,3314.37) R26.2@4340,3344.72 ; v1(4440,3314.37) R25.2@4440,3344.72 ; v1(4540,3314.37) R24.2@4540,3344.72 ; v1(4650,3314.37) R23.2@4650,3344.72
  Top Layer w20: C97.2@4057.32,3470 C96.1@4057.32,3520 4057.32,3577.32 J2.6@4090,3610 ; v1(8122,1450) v1(8152,1450) FB1.2@8186.85,1450 ; FB6.1@8950,2746.85 C104.2@8950,2690 ; v1(8980,2580) v1(8950,2580) v1(8950,2610) C103.2@8950,2640 ; v1(8980,2640) C103.2@8950,2640 ; v1(8980,2690) C104.2@8950,2690 ; C103.2@8950,2640 C104.2@8950,2690
  Bottom Layer w20: J2.6@4090,3610 4090,3464.37 v1(4240,3314.37) 4263.86,3314.37 4279.23,3299 4300.77,3299 4316.14,3314.37 v1(4340,3314.37) 4363.86,3314.37 4379.23,3299 4400.77,3299 4416.14,3314.37 v1(4440,3314.37) 4463.86,3314.37 4479.23,3299 4500.77,3299 4516.14,3314.37 v1(4540,3314.37) 4563.86,3314.37 4579.23,3299 4600.77,3299 4616.14,3314.37 v1(4650,3314.37)
+3V8: C49.2 C50.2 C51.2 C52.2 C53.2 C65.2 C66.2 C67.2 L2.2 R7.2 R8.2 U2.15 U2.16 U2.17 | length 1230.5
  Top Layer w15: R7.2@7945.28,2730 7945.28,2700.28 7945,2700 8011,2634 8221,2634 8234.65,2647.65 C49.2@8234.65,2680 8234.65,2722.01 R8.2@8242.64,2730 8665,2730 8688.5,2753.5 C53.2@8688.5,2850 C52.2@8688.5,2930 C51.2@8688.5,3010 C50.2@8688.5,3090
+5V: C7.2 C8.2 C9.2 C10.2 C11.2 J3.14 L1.2 R2.2 R41.2 | length 1579.8
  Top Layer w8: C7.2@6900,2435.35 6942.19,2435.35 6950,2427.54 R2.2@6950,2424.72 6950,2222 6918,2190 6918,1866 6949,1835 7129.02,1835 L1.2@7170,1875.98
  Top Layer w10: C11.2@7310,1700 7430,1700 7750,1380 R41.2@7847.36,1380
+8V: C60.2 C61.2 C88.2 C89.2 C90.1 C91.2 C111.2 C136.2 C137.1 C138.1 C153.1 C154.2 C155.1 L4.2 R43.2 R88.2 R89.2 R92.1 R93.1 U9.1 U9.3 U9.20 | length 4666.2
  Top Layer w10: v1(7810,1270) R43.2@7847.36,1270
  Top Layer w15: v1(1955,3005) C60.2@1955,3040 1960,3035 C111.2@2010,3035 ; L4.2@2010,2976.93 C111.2@2010,3035 ; v1(2010,3140) v1(2010,3110) C61.2@2010,3080 C111.2@2010,3035 ; C155.1@4330,1500 4330,1460 v1(4340,1450) ; C154.2@4380,1491.89 v1(4380,1450) ; C153.1@4420,1491.89 v1(4420,1450) ; C136.2@4900,1491.89 v1(4900,1450) ; C137.1@4940,1491.89 v1(4940,1450) ; C138.1@4990,1500 4990,1460 v1(4980,1450) ; C89.2@6020,2880 v1(6080,2880) C88.2@6130,2880 ; v1(6060,2990) v1(6100,2990) v1(6100,2950) C91.2@6130,2950 ; v1(6130,2830) C88.2@6130,2880 ; U9.1@6130,3030.31 v1(6130,2990) C91.2@6130,2950 ; v1(6180,2990) 6181.18,2991.18 U9.3@6181.18,3030.31 ; v1(4340,1450) v1(4380,1450) ; v1(4340,1450) R88.2@4340,1408.9 R89.2@4420,1408.9 v1(4420,1450) ; v1(4380,1450) v1(4420,1450) ; v1(4900,1450) R92.1@4900,1408.9 R93.1@4980,1408.9 v1(4980,1450) ; v1(4900,1450) v1(4940,1450) ; v1(4940,1450) v1(4980,1450) ; C88.2@6130,2880 C91.2@6130,2950 ; C90.1@6020,3030 6070,3030 v1(6080,3040) 6086.69,3046.69 U9.20@6086.69,3074.33 6044.33,3074.33 v1(6040,3070) 6020,3050 C90.1@6020,3030
  Bottom Layer w10: v1(4980,1450) 5110.3,1450 5121.3,1461 5138.7,1461 5149.7,1450 5525,1450 5734,1241 6231.3,1241 6251.3,1261 6268.7,1261 6288.7,1241 7781,1241 v1(7810,1270)
  other v1: 6080,2830 5990,2950 6060,2950 5990,3070
+9V: C80.2 C81.2 C82.2 C83.2 C84.2 C85.2 C86.2 C87.2 L3.2 R38.2 U9.15 U9.16 | length 690.2
  Top Layer w15: 6050,3180 6053.31,3176.69 U9.16@6085.98,3176.69 ; C87.2@6120,3280 6130,3270 U9.15@6130,3220 ; 6380,3790 6450,3860 C80.2@6885.35,3860 6885.35,3835.35 6874.72,3824.72 R38.2@6874.72,3810
ALIVE_LED: D6.2 U4.17 | length 2967.1
  Top Layer w10: D6.2@7750,70.47 7794.53,70.47 ; 7795,70 7794.53,70.47 ; U4.17@8452.36,1378.5 8451.86,1378 8451.86,1351.86 8402,1302 8402,917 8519,800 8913,800 8998,715 8998,221 8847.47,70.47 7794.53,70.47
BOOT0: R29.2 R31.1 U4.60 | length 293.5
  Top Layer w10: R29.2@8480,2020 8530.88,2020 R31.1@8531.08,2020.2 U4.60@8531.1,1821.5 ; U4.60@8531.1,1821.5 8531.1,1778.27 v1(8531.37,1778)
bypass_lane: C106.2 C149.2 | length 7061.5
  Top Layer w6.81: C106.2@660,2678.11 660,3128.58 cw(c760,3128.58) 689.29,3199.29 950.71,3460.71 cw(c1021.42,3390) 1021.42,3490 2635.86,3490 cw(c2635.86,3455.86) 2660,3480 2770.71,3369.29 ccw(c2841.42,3440) 2841.42,3340 3900,3340 cw(c3900,3191.01) 4005.36,3296.36 cw(c3897.57,3188.58) 4050,3188.58 4050,3081.42 ccw(c4181.38,3081.42) 4088.48,2988.52 4098.52,2978.48 ccw(c4191.42,3071.38) 4191.42,2940 5668.58,2940 cw(c5668.58,2840) 5739.29,2910.71 ; 5760,2890 5739.29,2910.71 ; C149.2@6250,2118.11 6250,2358.58 ccw(c6150,2358.58) 6220.71,2429.29 5739.29,2910.71
C0-5_PE4312: R128.2 U4.54 U10.20 | length 7357
  Top Layer w10: R128.2@2310,3152.28 v1(2310,3122) 2310,3075 2340.57,3044.43 U10.20@2340.57,2959.94 ; U4.54@8649.21,1821.5 8649.21,1730.79 v1(8650,1730)
  Bottom Layer w8: v1(2310,3122) 2310,3100 2502,2908 2502,2835 2598,2739 2852.72,2739 2871.72,2720 3001.72,2720 3011.72,2710 3220.24,2710 3224.71,2714.47 3482.24,2714.47 3506.72,2690 3781.72,2690 3801.72,2670 4051.72,2670 4101.72,2620 4242,2620 4245,2617 5052,2617 5389,2280 5418.28,2280 5430,2268.28 5430,2251.72 5441.72,2240 5985,2240 6001,2224 6136.64,2224 6188.64,2276 6207.72,2276 6211.72,2280 6288.28,2280 6306.28,2298 6794,2298 7209,1883 8301,1883 8470,1714 8632.31,1714 8648.31,1730 v1(8650,1730)
C1_PE4312: R127.2 U4.40 U10.19 | length 7630.3
  Top Layer w10: R127.2@2350,3152.28 v1(2350,3118.64) 2350,3085 2360.26,3074.74 U10.19@2360.26,2959.94 ; U4.40@8821.5,1590.16 8864.73,1590.16 v1(8865,1590.43)
  Bottom Layer w8: v1(2350,3118.64) 2520,2948.64 2520,2941.72 2523,2938.72 2523,2851 2574,2800 2928.28,2800 2938.28,2790 3001.72,2790 3021.72,2810 3328.28,2810 3378.28,2860 3988.28,2860 4000,2848.28 4000,2831.72 4011.72,2820 4048.28,2820 4110,2758.28 4110,2751.72 4161.72,2700 4314.64,2700 4326.36,2711.72 4479.28,2711.72 4491,2700 5063,2700 5442,2321 6210.72,2321 6211.72,2320 6288.28,2320 6302.61,2334.33 6825.67,2334.33 7254,1906 8316,1906 8316,1902.72 8491.72,1727 8597.14,1727 8628.14,1758 8673,1758 8810,1758 8850,1718 8850,1716.72 8865,1701.72 v1(8865,1590.43)
C2_PE4312: R126.2 U4.51 U10.17 | length 7120.1
  Top Layer w10: U10.17@2399.63,2959.94 2400,2960.31 v1(2400,3122) R126.2@2400,3152.28 ; v1(8689,1959) 8708.27,1939.73 U4.51@8708.27,1821.5
  Bottom Layer w8: v1(2400,3122) 2493,3029 2829.28,3029 2910,2948.28 2910,2941.72 2931.72,2920 3033,2920 3039,2914 4024,2914 4098,2840 4118.28,2840 4201,2757.28 4201,2748.69 4205.69,2744 5105,2744 5486,2363 6208.72,2363 6211.72,2360 6288.28,2360 6291.28,2363 6867,2363 6990,2240 8217,2240 8468,1989 8659,1989 v1(8689,1959)
C4_PE4312: R125.2 U4.52 U10.16 | length 7725.6
  Top Layer w10: U10.16@2419.31,2959.94 2419.31,3034.31 2440,3055 v1(2440,3121) R125.2@2440,3152.28 ; U4.52@8688.58,1821.5 8688.58,1778.27 v1(8688.85,1778)
  Bottom Layer w8: v1(2440,3121) 2459,3102 2651,3102 2779,3230 2779,3308.7 2791.3,3321 3968.7,3321 3981,3308.7 3981,3291.3 3958,3268.3 3958,3091 3999,3050 3999,3001.3 4090,2910.3 4090,2891 4129,2852 5100,2852 5551,2401 6170.72,2401 6171.72,2400 6188.28,2400 6189.28,2401 6239.3,2401 6241.3,2399 6268.7,2399 6270.7,2401 6871,2401 6980.7,2291.3 8484.7,2291.3 8727,2049 8727,1951.65 8648.63,1873.28 8648.63,1856.72 8679,1826.35 8679,1822.72 8688.85,1812.87 v1(8688.85,1778)
C8_PE4312: R59.2 U4.53 U10.15 | length 7610.1
  Top Layer w10: U10.15@2449.89,2929.37 2489.37,2929.37 2510,2950 2510,3065 2480,3095 v1(2480,3123.64) R59.2@2480,3152.28 ; v1(8668.63,1865) 8668.9,1864.73 U4.53@8668.9,1821.5
  Bottom Layer w8: v1(2480,3123.64) 2595.36,3123.64 2730,3258.28 2730,3347 2743,3360 3931.72,3360 3951.72,3340 3969.5,3340 4029.5,3280 4088.28,3280 4113.28,3255 4143.28,3255 4420,2978.28 4420,2958.28 4460,2918.28 4460,2901.72 4471.72,2890 5206,2890 5556,2540 6131.72,2540 6231.72,2440 6877,2440 6991,2326 8569,2326 8780,2115 8780,1976.37 v1(8668.63,1865)
C16_PE4312: R58.2 U4.2 U10.1 | length 7381.3
  Top Layer w10: R58.2@2270,3152.28 v1(2270,3122) 2270,2945 2285,2930 2309.37,2930 U10.1@2310,2929.37 ; U4.2@8378.5,1727.95 8421.73,1727.95 v1(8422,1728.22)
  Bottom Layer w8: v1(2270,3122) 2270,2887.11 2462.11,2695 2516,2695 2571,2640 2908.28,2640 2928.28,2620 3098.28,2620 3118.28,2640 3314.55,2640 3346.76,2607.79 3433.24,2607.79 3465.45,2640 3691.72,2640 3711.72,2620 3778.28,2620 3795,2603.28 3795,2596.72 3811.72,2580 4372,2580 4672,2280 5205.31,2280 5210,2275.31 5210,2201.72 5291.72,2120 6288.28,2120 6440.28,2272 6758,2272 7181,1849 8075.72,1849 8076.72,1850 8093.28,1850 8094.28,1849 8269,1849 8389.78,1728.22 v1(8422,1728.22)
DB_CE: J3.9 U4.33 | length 2365.6
  Top Layer w10: v1(8778,1452.09) 8778.27,1452.36 U4.33@8821.5,1452.36
  Bottom Layer w8: J3.9@6649.8,1800 6649.8,1790.2 6918,1522 8127,1522 8147,1542 8189.38,1542 8222.38,1575 8359,1575 8422,1512 8444,1512 8449,1507 8698,1507 8752.91,1452.09 v1(8778,1452.09)
DB_LD: J3.5 U4.44 | length 2823.2
  Top Layer w8: U4.44@8821.5,1668.9 8932.31,1668.9 8941.21,1660 v1(8945,1660)
  Bottom Layer w8: J3.5@6649.8,2000 6992.8,1657.01 7297.99,1657.01 7343,1612 8061,1612 8075,1626 8317.72,1626 8321.72,1630 8396,1630 8434,1592 8688.55,1592 8769.72,1510.83 8773.17,1510.83 8813,1471 8907,1471 8945,1509 v1(8945,1660)
DB_LE: J3.7 U4.30 | length 2363.4
  Top Layer w10: v1(8679,1527) 8679,1461 8708.27,1431.73 U4.30@8708.27,1378.5
  Bottom Layer w8: J3.7@6649.8,1900 6984.8,1565 8137,1565 8160,1588 8372,1588 8410,1550 8656,1550 v1(8679,1527)
DOWN_BUT: J2.11 R46.1 | length 228.1
  Top Layer w10: J2.11@4290,3710 4340,3660 R46.1@4340,3502.64
DOWN_BUT_uC: C94.2 R26.1 R46.2 U4.38 | length 7824.2
  Top Layer w8: U4.38@8821.5,1550.79 8980.79,1550.79 9025,1595 9324,1595 9492,1427 v1(9561,1427)
  Top Layer w10: R46.2@4340,3457.36 R26.1@4340,3390 C94.2@4390,3390 v1(4390,3430)
  Bottom Layer w8: v1(4390,3430) 4356,3464 4273,3464 4260,3451 4260,3419 4315,3364 4395.72,3364 4481.72,3450 4533,3450 4607,3376 5991.17,3376 6036.67,3421.5 6277.5,3421.5 6318,3381 6886,3381 7017,3250 7017,2942 7085,2874 7085,2672 7142.57,2614.43 7207.57,2614.43 7254,2568 8632,2568 8652,2548 9517,1683 9517,1643 9532,1628 9532,1456 v1(9561,1427)
ENTER_BUT: J2.10 R47.1 | length 228.1
  Top Layer w10: J2.10@4190,3710 4240,3660 R47.1@4240,3502.64
ENTER_BUT_uC: C95.2 R27.1 R47.2 U4.39 | length 7571.9
  Top Layer w8: U4.39@8821.5,1570.47 8821.55,1570.43 8967.43,1570.43 9019,1622 9358,1622 9482,1498 v1(9559,1498)
  Top Layer w10: R47.2@4240,3457.36 R27.1@4240,3390 C95.2@4290,3390 v1(4290,3430)
  Bottom Layer w8: v1(4290,3430) 4329,3391 4384,3391 4464,3471 4549,3471 4628,3392 4772,3392 4852,3472 6660,3472 6712,3420 7181,3420 7399,3202 7399,2924 7399,2726 7508.5,2616.5 8651.5,2616.5 9559,1709 v1(9559,1498)
EPROM_SCL: R9.1 U4.61 U11.1 | length 1485.3
  Top Layer w7: U4.61@8511.42,1821.5 8511.42,1942.58 8429,2025 8429,2118 8522,2211 9261,2211 9323.18,2148.82 U11.1@9362.6,2148.82 ; R9.1@9360,1992.64 9362.6,1995.24 U11.1@9362.6,2148.31
EPROM_SDA: R10.1 U4.62 U11.3 | length 1705.7
  Top Layer w7: U4.62@8491.73,1821.5 8491.73,1845 8497.42,1850.68 8497.42,1854.02 8497.63,1854.24 8497.63,1929.37 8478,1949 8443,1949 8397,1995 8397,2165 8480,2248 9291,2248 9340,2199 9429,2199 9437.4,2190.6 U11.3@9437.4,2148.82 9437.4,1995.24 R10.1@9440,1992.64